# Altium PCB lab2_lyahovskij_buck.PcbDoc
Units mm, origin at the board's own origin, x right, y up, seen from the top; angles counter-clockwise.
Board outline 65 x 24 mm, 2 copper layers (Top Layer, Bottom Layer), stack 1.536 mm thick; 39 components, 24 nets, 118 pads, 157 vias.
Unrouted connection lines stored in the file: 1.
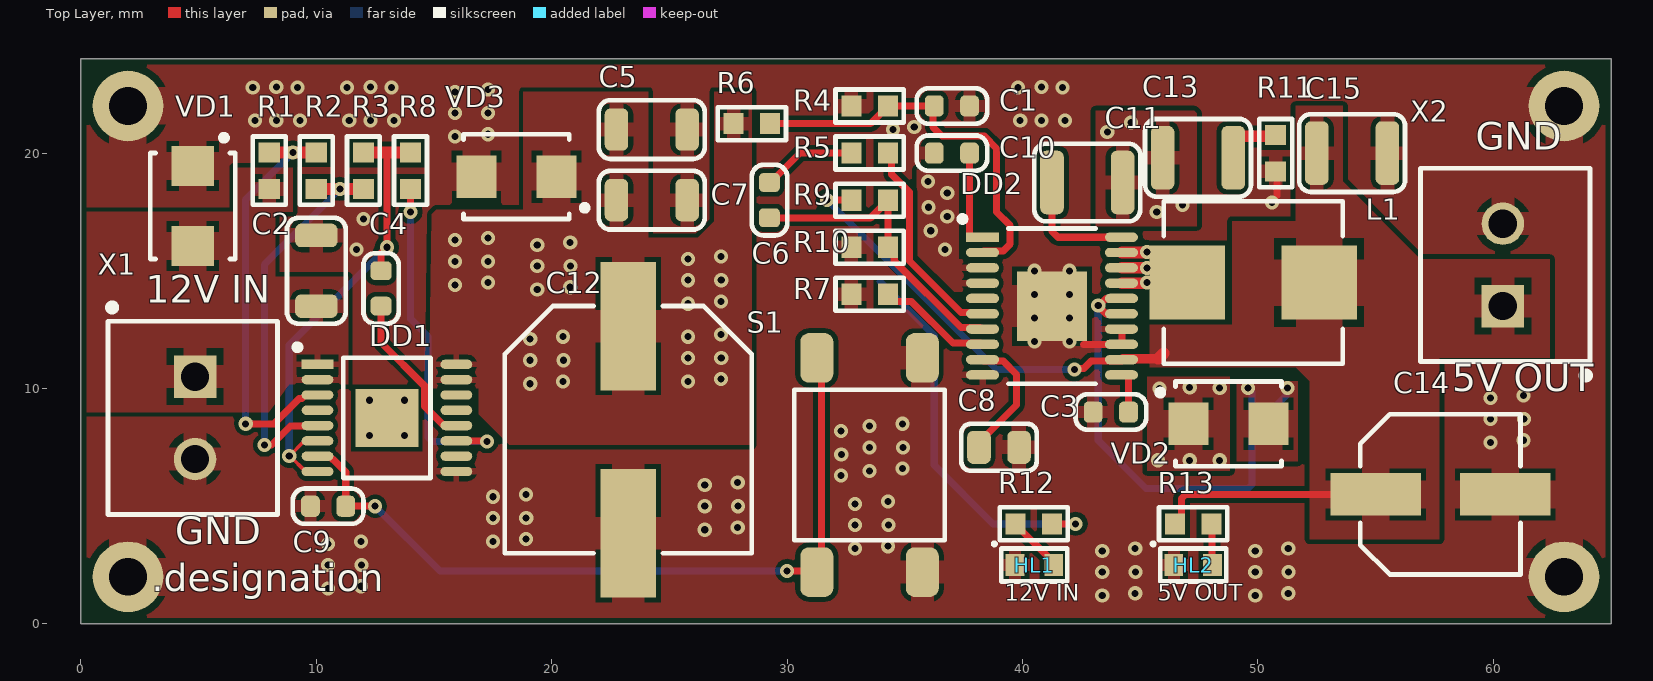
[diagram p0: Top Layer view]
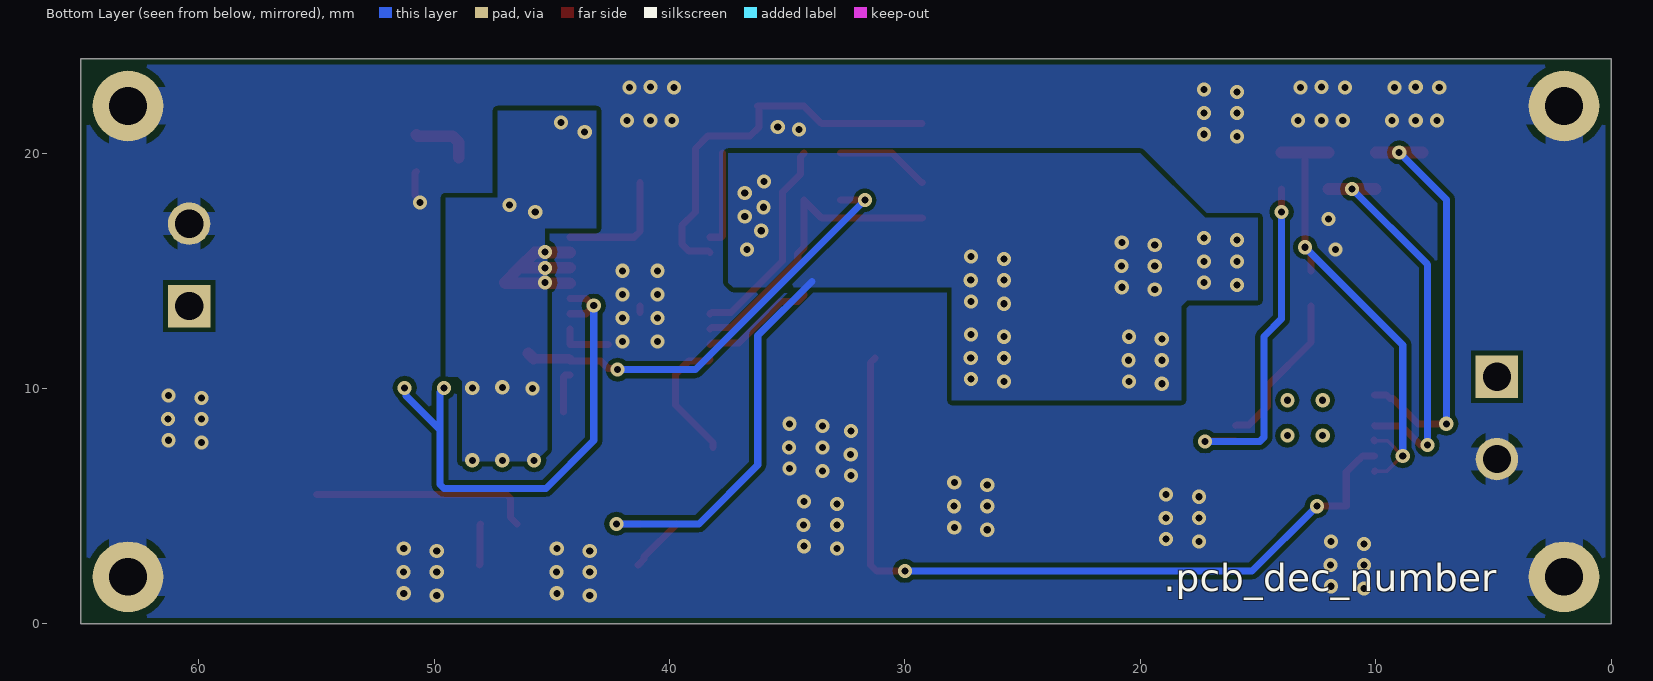
[diagram p1: Bottom Layer view, seen from below]

## Layer stack, top to bottom
Top Solder: solder mask 0.0102, Solder Resist, Dk 3.5
Top Layer: signal copper 0.018
Core 1: core 1.5, FR4, Dk 4.6
Bottom Layer: signal copper 0.018
Bottom Solder: solder mask 0.0102, Solder Resist, Dk 3.5

## Board outline
0,0 65,0 65,24 0,24

## Design rules (kind name [scope] priority, off if disabled: settings)
AcuteAngle min_acute_angle [OnCopper] p1: minimum=3.50000000000000E+0001 checktracksonly=FALSE // Минимальный угол между примитивами топологии
BoardOutlineClearance board_outline_clearance_std [NOT (OnLayer('Bottom Overlay') OR OnLayer('Top Overlay'))] p1: gap=0.25 ignorepadtopadclearanceinfootprint=FALSE except(0: Arc-SplitContinuation Track-SplitContinuation SMDPad-SplitContinuation THPad-SplitContinuation Via-SplitContinuation Fill-SplitContinuation Poly-SplitContinuation Region-SplitContinuation Text-SplitContinuation) // Отступ элементов топологии от края фрезеруемой печатной платы
Clearance clearance_outer_18um_std [OnTopLayer OR OnBottomLayer] p1: gap=0.125 ignorepadtopadclearanceinfootprint=TRUE except(0.2: Arc-Fill Arc-Poly Track-Fill Track-Poly SMDPad-SMDPad SMDPad-Fill SMDPad-Poly THPad-Fill THPad-Poly Via-Fill Via-Poly Fill-Fill Fill-Poly Poly-Poly Poly-Region Poly-Text; 0.25: Arc-Hole Track-Hole SMDPad-Hole THPad-Hole Via-Hole Fill-Hole Poly-Hole Region-Hole Text-Hole) // Зазоры на внешних слоях
Clearance clearance_inner_18um_std [NOT (OnTopLayer Or OnBottomLayer)] p2: gap=0.125 ignorepadtopadclearanceinfootprint=FALSE except(0.2: Arc-Fill Arc-Poly Track-Fill Track-Poly SMDPad-SMDPad SMDPad-Fill SMDPad-Poly THPad-Fill THPad-Poly Via-Fill Via-Poly Fill-Fill Fill-Poly Poly-Poly Poly-Region Poly-Text; 0.25: Arc-Hole Track-Hole SMDPad-Hole THPad-Hole Via-Hole Fill-Hole Poly-Hole Region-Hole Text-Hole) // Зазоры на внутренних слоях
ComponentClearance [All] p1: gap=0 collisioncheckmode=3 verticalgap=0 showdistances=FALSE
DiffPairsRouting diff_pairs_routing [All] p1: maxlimit=0.127 minlimit=0.127 mostfreqgap=0.127 toplayer_minwidth=0.143 toplayer_maxwidth=0.143 toplayer_prefwidth=0.143 bottomlayer_minwidth=0.143 bottomlayer_maxwidth=0.143 bottomlayer_prefwidth=0.143 impedanceprofiledriven=TRUE impedanceprofileid={FD46899E-B5A2-4EF5-A302-5D2DB6A51F35} maxuncoupledlength=12.7 // Правила трассировки дифференциальных пар
HoleSize min_hole_size_std [IsPad] p1: absolutevalues=TRUE maxlimit=5.9 minlimit=0.6 maxpercent=80.000 minpercent=20.000 // Диаметр межслойного переходного отверстия
HoleSize min_hole_size_via_std [IsVia] p2: absolutevalues=TRUE maxlimit=5.9 minlimit=0.3 maxpercent=80.000 minpercent=20.000 // Минимальный диаметр монтажного отверстия
HoleToHoleClearance hole_to_hole_clearance_std [All] p1: gap=0.2 allowstackedmicrovias=FALSE // Минимальное расстояние между краями двух отверстий
MinimumAnnularRing min_via_ar_std [All] p1: minimumring=0.15 // Поясок площадки переходного отверстия (Annular ring VIA)
MinimumAnnularRing min_pad_ar_std [All] p2: minimumring=0.2 // Поясок монтажной контактной площадки (Annular ring PAD)
MinimumSolderMaskSliver min_solder_mask_bridge_std [All] p1: minsoldermaskwidth=0.15 // Мнимальная ширина масочного мостика
PlaneClearance plane_clearance_18um_std [All] p1: clearance=0.2 // Отступ полигона (для слоя plane) от элементов топологии
PlaneConnect [All] p1: planeconnectstyle=Relief reliefexpansion=0.5 reliefentries=4 reliefconductorwidth=0.2 reliefairgap=0.2
PolygonConnect poly_connect_to_pad<=0.3 [(AsMM(PadXSize_AllLayers)<=0.301) or (AsMM(PadYSize_AllLayers)<=0.301)] p1: thpad.connectstyle=Relief thpad.reliefconductorwidth=0.2 thpad.reliefentries=4 thpad.polygonreliefangle="90 Angle" thpad.airgapwidth=0.2 smdpad.connectstyle=Relief smdpad.reliefconductorwidth=0.2 smdpad.reliefentries=4 smdpad.polygonreliefangle="90 Angle" smdpad.airgapwidth=0.2 via.connectstyle=Direct via.reliefconductorwidth=0.254 via.reliefentries=4 via.polygonreliefangle="90 Angle" via.airgapwidth=0.254 // Правила подключения полигонов для падов от 0,3мм и меньше
PolygonConnect poly_connect_to_pad<=0.4 [(AsMM(PadXSize_AllLayers)<=0.401) or (AsMM(PadYSize_AllLayers)<=0.401)] p2: thpad.connectstyle=Relief thpad.reliefconductorwidth=0.26 thpad.reliefentries=4 thpad.polygonreliefangle="90 Angle" thpad.airgapwidth=0.2 smdpad.connectstyle=Relief smdpad.reliefconductorwidth=0.26 smdpad.reliefentries=4 smdpad.polygonreliefangle="90 Angle" smdpad.airgapwidth=0.2 via.connectstyle=Direct via.reliefconductorwidth=0.254 via.reliefentries=4 via.polygonreliefangle="90 Angle" via.airgapwidth=0.254 // Правила подключения полигонов для падов от 0,4 и меньше
PolygonConnect poly_connect_to_pad<=0.6 [(AsMM(PadXSize_AllLayers)<=0.601) or (AsMM(PadYSize_AllLayers)<=0.601)] p3: thpad.connectstyle=Relief thpad.reliefconductorwidth=0.33 thpad.reliefentries=4 thpad.polygonreliefangle="90 Angle" thpad.airgapwidth=0.2 smdpad.connectstyle=Relief smdpad.reliefconductorwidth=0.33 smdpad.reliefentries=4 smdpad.polygonreliefangle="90 Angle" smdpad.airgapwidth=0.2 via.connectstyle=Direct via.reliefconductorwidth=0.254 via.reliefentries=4 via.polygonreliefangle="90 Angle" via.airgapwidth=0.254 // Правила подключения полигонов для падов от 0,6мм и меньше
PolygonConnect poly_connect_to_pad<=0.7 [(AsMM(PadXSize_AllLayers)<=0.701) or (AsMM(PadYSize_AllLayers)<=0.701)] p4: thpad.connectstyle=Relief thpad.reliefconductorwidth=0.46 thpad.reliefentries=4 thpad.polygonreliefangle="90 Angle" thpad.airgapwidth=0.2 smdpad.connectstyle=Relief smdpad.reliefconductorwidth=0.46 smdpad.reliefentries=4 smdpad.polygonreliefangle="90 Angle" smdpad.airgapwidth=0.2 via.connectstyle=Direct via.reliefconductorwidth=0.254 via.reliefentries=4 via.polygonreliefangle="90 Angle" via.airgapwidth=0.254 // Правила подключения полигонов для падов от 0,7мм и меньше
PolygonConnect poly_connect_to_pad<=0.8 [(AsMM(PadXSize_AllLayers)<=0.8)or(AsMM(PadYSize_AllLayers)<=0.8)] p5: thpad.connectstyle=Relief thpad.reliefconductorwidth=0.53 thpad.reliefentries=4 thpad.polygonreliefangle="90 Angle" thpad.airgapwidth=0.3 smdpad.connectstyle=Relief smdpad.reliefconductorwidth=0.53 smdpad.reliefentries=4 smdpad.polygonreliefangle="90 Angle" smdpad.airgapwidth=0.2 via.connectstyle=Direct via.reliefconductorwidth=0.254 via.reliefentries=4 via.polygonreliefangle="90 Angle" via.airgapwidth=0.254 // Правила подключения полигонов для падов от 0,8мм и меньше
PolygonConnect poly_connect_to_pad<=1 [(AsMM(PadXSize_AllLayers)<=1.01)or(AsMM(PadYSize_AllLayers)<=1.01)] p6: thpad.connectstyle=Relief thpad.reliefconductorwidth=0.6 thpad.reliefentries=4 thpad.polygonreliefangle="90 Angle" thpad.airgapwidth=0.3 smdpad.connectstyle=Relief smdpad.reliefconductorwidth=0.6 smdpad.reliefentries=4 smdpad.polygonreliefangle="90 Angle" smdpad.airgapwidth=0.2 via.connectstyle=Direct via.reliefconductorwidth=0.254 via.reliefentries=4 via.polygonreliefangle="90 Angle" via.airgapwidth=0.254 // Правила подключения полигонов для падов от 1мм и меньше
PolygonConnect poly_connect_to_pad<=1.3 [(AsMM(PadXSize_AllLayers)<=1.31)or(AsMM(PadYSize_AllLayers)<=1.31)] p7: thpad.connectstyle=Relief thpad.reliefconductorwidth=0.66 thpad.reliefentries=4 thpad.polygonreliefangle="90 Angle" thpad.airgapwidth=0.3 smdpad.connectstyle=Relief smdpad.reliefconductorwidth=0.86 smdpad.reliefentries=4 smdpad.polygonreliefangle="90 Angle" smdpad.airgapwidth=0.2 via.connectstyle=Direct via.reliefconductorwidth=0.254 via.reliefentries=4 via.polygonreliefangle="90 Angle" via.airgapwidth=0.254 // Правила подключения полигонов для падов от 1,3мм и меньше
PolygonConnect poly_connect_to_pad<=1.6 [(AsMM(PadXSize_AllLayers)<=1.61)or(AsMM(PadYSize_AllLayers)<=1.61)] p8: thpad.connectstyle=Relief thpad.reliefconductorwidth=0.8 thpad.reliefentries=4 thpad.polygonreliefangle="90 Angle" thpad.airgapwidth=0.3 smdpad.connectstyle=Relief smdpad.reliefconductorwidth=1 smdpad.reliefentries=4 smdpad.polygonreliefangle="90 Angle" smdpad.airgapwidth=0.2 via.connectstyle=Direct via.reliefconductorwidth=0.254 via.reliefentries=4 via.polygonreliefangle="90 Angle" via.airgapwidth=0.254 // Правила подключения полигонов для падов от 1,6мм и меньше
PolygonConnect poly_connect_to_pad<=1.8 [(AsMM(PadXSize_AllLayers)<=1.8)or(AsMM(PadYSize_AllLayers)<=1.8)] p9: thpad.connectstyle=Relief thpad.reliefconductorwidth=1 thpad.reliefentries=4 thpad.polygonreliefangle="90 Angle" thpad.airgapwidth=0.3 smdpad.connectstyle=Relief smdpad.reliefconductorwidth=1.2 smdpad.reliefentries=4 smdpad.polygonreliefangle="90 Angle" smdpad.airgapwidth=0.2 via.connectstyle=Direct via.reliefconductorwidth=0.254 via.reliefentries=4 via.polygonreliefangle="90 Angle" via.airgapwidth=0.254 // Правила подключения полигонов для падов от 1,8мм и меньше
PolygonConnect poly_connect_to_pad<=2 [(AsMM(PadXSize_AllLayers)<=2.01)or(AsMM(PadYSize_AllLayers)<=2.01)] p10: thpad.connectstyle=Relief thpad.reliefconductorwidth=1.1 thpad.reliefentries=4 thpad.polygonreliefangle="90 Angle" thpad.airgapwidth=0.3 smdpad.connectstyle=Relief smdpad.reliefconductorwidth=1.4 smdpad.reliefentries=4 smdpad.polygonreliefangle="90 Angle" smdpad.airgapwidth=0.2 via.connectstyle=Direct via.reliefconductorwidth=0.254 via.reliefentries=4 via.polygonreliefangle="90 Angle" via.airgapwidth=0.254 // Правила подключения полигонов для падов от 2мм и меньше
PolygonConnect poly_connect_to_pad<=2.3 [(AsMM(PadXSize_AllLayers)<=2.31)or(AsMM(PadYSize_AllLayers)<=2.31)] p11: thpad.connectstyle=Relief thpad.reliefconductorwidth=1.2 thpad.reliefentries=4 thpad.polygonreliefangle="90 Angle" thpad.airgapwidth=0.3 smdpad.connectstyle=Relief smdpad.reliefconductorwidth=1.4 smdpad.reliefentries=4 smdpad.polygonreliefangle="90 Angle" smdpad.airgapwidth=0.2 via.connectstyle=Direct via.reliefconductorwidth=0.254 via.reliefentries=4 via.polygonreliefangle="90 Angle" via.airgapwidth=0.254 // Правила подключения полигонов для падов от 2,3мм и меньше
PolygonConnect poly_connect_to_pad<=2.5 [(AsMM(PadXSize_AllLayers)<=2.51)or(AsMM(PadYSize_AllLayers)<=2.51)] p12: thpad.connectstyle=Relief thpad.reliefconductorwidth=1.2 thpad.reliefentries=4 thpad.polygonreliefangle="90 Angle" thpad.airgapwidth=0.3 smdpad.connectstyle=Relief smdpad.reliefconductorwidth=1.4 smdpad.reliefentries=4 smdpad.polygonreliefangle="90 Angle" smdpad.airgapwidth=0.2 via.connectstyle=Direct via.reliefconductorwidth=0.254 via.reliefentries=4 via.polygonreliefangle="90 Angle" via.airgapwidth=0.254 // Правила подключения полигонов для падов от 2,5мм и меньше
PolygonConnect poly_connect_to_pad<=2.7 [(AsMM(PadXSize_AllLayers)<=2.71)or(AsMM(PadYSize_AllLayers)<=2.71)] p13: thpad.connectstyle=Relief thpad.reliefconductorwidth=1.4 thpad.reliefentries=4 thpad.polygonreliefangle="90 Angle" thpad.airgapwidth=0.3 smdpad.connectstyle=Relief smdpad.reliefconductorwidth=1.6 smdpad.reliefentries=4 smdpad.polygonreliefangle="90 Angle" smdpad.airgapwidth=0.2 via.connectstyle=Direct via.reliefconductorwidth=0.254 via.reliefentries=4 via.polygonreliefangle="90 Angle" via.airgapwidth=0.254 // Правила подключения полигонов для падов от 2,7мм и меньше
PolygonConnect poly_connect_to_pad<=3 [(AsMM(PadXSize_AllLayers)<=3.01)or(AsMM(PadYSize_AllLayers)<=3.01)] p14: thpad.connectstyle=Relief thpad.reliefconductorwidth=1.6 thpad.reliefentries=4 thpad.polygonreliefangle="90 Angle" thpad.airgapwidth=0.3 smdpad.connectstyle=Relief smdpad.reliefconductorwidth=1.8 smdpad.reliefentries=4 smdpad.polygonreliefangle="90 Angle" smdpad.airgapwidth=0.2 via.connectstyle=Direct via.reliefconductorwidth=0.254 via.reliefentries=4 via.polygonreliefangle="90 Angle" via.airgapwidth=0.254 // Правила подключения полигонов для падов от 3мм и меньше
PolygonConnect poly_connect_to_pad<=7 [(AsMM(PadXSize_AllLayers)<7.01)or(AsMM(PadYSize_AllLayers)<=7.01)] p15: thpad.connectstyle=Relief thpad.reliefconductorwidth=2 thpad.reliefentries=4 thpad.polygonreliefangle="90 Angle" thpad.airgapwidth=0.4 smdpad.connectstyle=Relief smdpad.reliefconductorwidth=2 smdpad.reliefentries=4 smdpad.polygonreliefangle="90 Angle" smdpad.airgapwidth=0.3 via.connectstyle=Direct via.reliefconductorwidth=0.254 via.reliefentries=4 via.polygonreliefangle="90 Angle" via.airgapwidth=0.254 // Правила подключения полигонов для падов от 7мм и меньше
PolygonConnect poly_connect_to_pad [All] p16: thpad.connectstyle=Relief thpad.reliefconductorwidth=0.25 thpad.reliefentries=4 thpad.polygonreliefangle="90 Angle" thpad.airgapwidth=0.2 smdpad.connectstyle=Relief smdpad.reliefconductorwidth=0.25 smdpad.reliefentries=4 smdpad.polygonreliefangle="90 Angle" smdpad.airgapwidth=0.2 via.connectstyle=Direct via.reliefconductorwidth=0.25 via.reliefentries=4 via.polygonreliefangle="90 Angle" via.airgapwidth=0.2 // Правила подключения полигонов общие
RoutingCorners [All] p1 off: cornerstyle=45-Degree minsetback=2.5 maxsetback=2.5
RoutingVias [All] p1: holewidth=0.3 width=0.6 viastyle="Through Hole" minholewidth=0.3 minwidth=0.6 maxholewidth=5.9 maxwidth=6.4
SilkToSilkClearance silk_to_silk_clearance_std [All] p1 off: silktosilkclearance=0.15 // Отступ текста шелкографии от других примитивов шелкографии
SilkToSolderMaskClearance silk_to_solder_mask_clearance_std [IsPad] p1 off: minsilkscreentomaskgap=0.15 clearancetoexposedcopper=FALSE // Минимальное расстояние между элементами шелкографии и вскрытой медью
SolderMaskExpansion solder_mask_expansion_std [All] p1: expansion=0.05 // Припуск паяльной масски
UnRoutedNet [All] p1: checkbadconnections=TRUE
Width width_18um_std [All] p1: maxlimit=10 minlimit=0.125 preferedwidth=0.15 checkconnectedcopper=TRUE // Ширина проводников (общая)
19 further rules are at their usual default settings.

## Components (designator, comment, footprint, x,y, rotation, side; value= is the part's Value field where it differs from the comment)
C1 "4,7 мк" C0603 37,22 r0 top
C2 "1 мк" C1206 10,15 r90 top
C3 "0,01 мк" C0603 43.75,9 r180 top
C4 "82" C0603 12.75,14.25 r90 top
C5 "2,2 мк" C1206 24.25,21 r0 top
C6 "0,01 мк" C0603 29.25,18 r90 top
C7 "2,2 мк" C1206 24.25,18 r0 top
C8 "150" C0805 39,7.5 r0 top
C9 "0,1 мк" C0603 10.5,5 r180 top
C10 "0,47 мк" C0603 37,20 r180 top
C11 "0,022 мк" C1210 42.75,18.75 r0 top
C12 "47 мк" CAPAE-1000X1000X1200 23.25,8.25 r270 top
C13 "330" C1210 47.45,19.8 r0 top
C14 "150 мк" CAPAE-660X660X580 57.75,5.5 r0 top
C15 "22 мк" C1210 54,20 r0 top
DD1 "TPS26600PWPR" HTSSOP-16 13,8.75 r0 top
DD2 "LM5576MH/NOPB" HTSSOP-20 41.25,13.5 r0 top
HL1 "TLMG1100-GS08" HL0603 40.5,2.5 r0 top
HL2 "TLMB1100-GS08" HL0603 47.25,2.5 r0 top
L1 "SRP7028A-150M" SRP-2-730X660X280 49.8,14.5 r0 top
R1 "523 к" R0603 8,19.25 r270 top
R2 "26,7 к" R0603 10,19.25 r90 top
R3 "44,2 к" R0603 12,19.25 r270 top
R4 "2,2 к" R0603 33.5,22 r0 top
R5 "49,9 к" R0603 33.5,20 r180 top
R6 "15 к" R0603 28.5,21.25 r180 top
R7 "21 к" R0603 33.5,14 r0 top
R8 "6,04 к" R0603 14,19.25 r270 top
R9 "5,1 к" R0603 33.5,18 r180 top
R10 "1,6 к" R0603 33.5,16 r0 top
R11 "22" R0603 50.75,20 r90 top
R12 "22 к" R0603 40.475,4.25 r0 top
R13 "10 к" R0603 47.25,4.25 r0 top
S1 "FSM4JSMA" FSM4JSMA 33.5,6.75 r90 top
VD1 "1.5SMC62CA" DO-214AB 4.75,17.75 r270 top
VD2 "SS36-E3/57T" DO-214AB 48.75,8.5 r0 top
VD3 "SL13-E3/5AT" DO-214AC 18.5,19 r180 top
X1 "1776275-2" 1776275-2 4.75,8.75 r270 top
X2 "1776275-2" 1776275-2 60.5,15.25 r90 top

## Footprints (in the part's own frame and the unit in brackets; to place one, negate y for a bottom-side part, rotate by r counter-clockwise, add the part's x,y. Pads: shape width x height; smd on the part's side, far side on the other; paste and mask are expansions set on the pad)
1776275-2 [mm] "PCB Terminal Blocks, Header, Wire-to-Board, 2 Position, 3.5mm [.138in] Centerline, 1 Row, Side Wire Entry Angle, 26 – 18AWG Wire Size"
  rect 1.8x1.8 hole 1.2: 1(-1.75,0.1)
  round 1.8 hole 1.2: 2(1.75,0.1)
  silkscreen extent -4.7,-3.6 4.1,3.6, body extent -4,-3.5 4,3.5, height 8.3
C0603 [mm] "Chip Capacitor, 2-Leads, Body 1,60x0,80mm, IPC Medium Density"
  rrect50% 0.8x0.9 smd: 1(-0.75,0) 2(0.75,0)
  silkscreen extent -1.5,-0.75 1.5,0.75, body extent -0.8,-0.4 0.8,0.4, height 0.8
C0805 [mm] "Chip Capasitor, 2-Leads, Body 2,00x1,25mm, IPC Medium Density"
  rrect50% 1x1.4 smd: 1(-0.85,0) 2(0.85,0)
  silkscreen extent -1.6,-1 1.6,1, body extent -1,-0.62 1,0.63, height 0.6
C1206 [mm] "Chip Capacitor, 2-Leads, Body 3,20x1,60mm, IPC Medium Density"
  rrect50% 1x1.8 smd: 1(-1.5,0) 2(1.5,0)
  silkscreen extent -2.25,-1.25 2.25,1.25, body extent -1.6,-0.8 1.6,0.8, height 0.78
C1210 [mm] "Chip Capacitor, 2-Leads, Body 3,20x2,50mm, IPC Medium Density"
  rrect50% 1x2.7 smd: 1(-1.5,0) 2(1.5,0)
  silkscreen extent -2.25,-1.65 2.25,1.65, body extent -1.6,-1.25 1.6,1.25, height 0.78
CAPAE-660X660X580 [mm] "Aluminum Electrolytic Capacitor, Body 6,60x6,60x6,10mm, IPC Low Density"
  rect 3.85x1.8 smd: 1(-2.75,0) 2(2.75,0)
  silkscreen extent -3.4,-3.4 3.4,3.4, body extent -3.65,-3.3 3.65,3.3, height 5.8
CAPAE-1000X1000X1200 [mm] "Aluminum Electrolytic Capacitor, Body 10,50x10,50x12,50mm, IPC Low Density"
  rect 5.45x2.35 smd: 1(-4.4,0) 2(4.4,0)
  silkscreen extent -5.25,-5.25 5.25,5.25, body extent -6.05,-5.25 6.05,5.25, height 12.5
DO-214AB [mm] "Molded Diode, 2-Leads, Body 6,86x5,91mm, IPC Medium Density"
  rect 1.7x1.8 smd: 1(-1.7,0) 2(1.7,0)
  silkscreen extent -3.02,-1.8 2.25,1.8, body extent -2.7,-1.81 2.7,1.81, height 2.43
DO-214AC [mm] "Molded Diode, 2-Leads, Body 4,25x2,67mm, IPC Medium Density"
  rect 1.7x1.8 smd: 1(-1.7,0) 2(1.7,0)
  silkscreen extent -3.03,-1.8 2.25,1.8, body extent -2.7,-1.81 2.7,1.81, height 2.43
FSM4JSMA [mm]
  rrect50% 2.1x1.4 smd: 1(-4.55,2.24) 1(4.55,2.24) 2(-4.55,-2.24) 2(4.55,-2.24)
  silkscreen extent -3.2,-3.2 3.2,3.2, body extent -5,-3 5,3, height 5.13
HL0603 [mm] "Chip Diode, 2-Leads, Body 1,60x0,80mm, IPC Medium Density"
  rect 0.8x0.95 smd: 1(-0.825,0) 2(0.825,0)
  silkscreen extent -1.75,-0.7 1.4,0.95, body extent -0.81,-0.4 0.81,0.4, height 0.6
HTSSOP-16 [mm] "TSOP, 16-Leads, Body 5,00x4,40mm, Pitch 0,65mm, Thermal Pad 2,46x2,66mm, IPC Medium Density"
  rect 2.66x2.46 smd: 0(0,0)
  rect 1.35x0.4 smd: 1(-2.95,2.275)
  oval 1.35x0.4 smd: 2(-2.95,1.625) 3(-2.95,0.975) 4(-2.95,0.325) 5(-2.95,-0.325) 6(-2.95,-0.975) 7(-2.95,-1.625) 8(-2.95,-2.275) 9(2.95,-2.275) 10(2.95,-1.625) 11(2.95,-0.975) 12(2.95,-0.325) 13(2.95,0.325) 14(2.95,0.975) 15(2.95,1.625) 16(2.95,2.275)
  silkscreen extent -3.92,-2.55 1.85,3.12, body extent -3.2,-2.5 3.2,2.5, height 1.2
HTSSOP-20 [mm] "TSOP, 20-Leads, Body 6,50x4,40mm, Pitch 0,65mm, Thermal Pad 2,96x2,96mm, IPC Medium Density"
  rect 2.96x2.96 smd: 0(0,0)
  rect 1.4x0.4 smd: 1(-2.95,2.925)
  oval 1.4x0.4 smd: 2(-2.95,2.275) 3(-2.95,1.625) 4(-2.95,0.975) 5(-2.95,0.325) 6(-2.95,-0.325) 7(-2.95,-0.975) 8(-2.95,-1.625) 9(-2.95,-2.275) 10(-2.95,-2.925) 11(2.95,-2.925) 12(2.95,-2.275) 13(2.95,-1.625) 14(2.95,-0.975) 15(2.95,-0.325) 16(2.95,0.325) 17(2.95,0.975) 18(2.95,1.625) 19(2.95,2.275) 20(2.95,2.925)
  silkscreen extent -3.92,-3.3 1.85,3.82, body extent -3.2,-3.25 3.2,3.25, height 1.1
R0603 [mm] "Chip Resistor, 2-Leads, Body 1,60x0,80mm, IPC Medium Density"
  rect 0.85x0.9 smd: 1(-0.775,0) 2(0.775,0)
  silkscreen extent -1.45,-0.7 1.45,0.7, body extent -0.8,-0.4 0.8,0.4, height 0.45
SRP-2-730X660X280 [mm] "Precision Wire Wound Inductor, 2-Leads, Body 7,30x6,60mm, IPC Medium Density"
  rect 3.2x3.15 smd: 1(-2.8,0) 2(2.8,0)
  silkscreen extent -3.8,-3.45 3.8,3.45, body extent -3.7,-3.3 3.7,3.3, height 3

## Part data
C1: library part c0082, "=Описание", HelpURL=https://www.yageo.com/upload/media/product/productsearch/datasheet/mlcc/UPY-GPHC_X7R_6.3V-to-50V_20.pdf, ID=c0082, Корпус=0603, Наименование=CC0603KRX7R6BB475, Напряжение="10 В", Номинал="4,7 мк", Номинальное напряжение="10 В", Описание="Конденсатор чип 0603 4,7 мкФ 10 В ±10 %", Отклонение="±10 %", Производитель="YAGEO Corp.", Рабочие температуры="от –55 °С до +125 °С", Температурный коэффициент емкости=X7R, Фамилия=Паньков
C2: library part c0066, "=Описание", HelpURL=https://www.yageo.com/upload/media/product/productsearch/datasheet/mlcc/UPY-NP0X7R_MV_100-to-630V_22.pdf, ID=c0066, Корпус=1206, Наименование=CC1206KKX7R0BB105, Напряжение="100 В", Номинал="1 мк", Номинальное напряжение="100 В", Описание="Конденсатор чип 1206 1 мкФ 100 В ±10 %", Отклонение="±10 %", Производитель="YAGEO Corp.", Рабочие температуры="от –55 °С до +125 °С", Температурный коэффициент емкости=X7R, Фамилия=Ларионов
C3 C6: library part c0021, "=Описание", HelpURL=https://www.yageo.com/upload/media/product/productsearch/datasheet/mlcc/UPY-NP0X7R_MV_100-to-630V_22.pdf, ID=c0021, Корпус=0603, Наименование=CC0603JRX7R0BB103, Напряжение="100 В", Номинал="0,01 мк", Номинальное напряжение="100 В", Описание="Конденсатор чип 0603 10 нФ 100 В ±5 %", Отклонение="±5 %", Производитель="YAGEO Corp.", Рабочие температуры="от –55 °С до +125 °С", Температурный коэффициент емкости=X7R, Фамилия=Ларионов
C4: library part c0011, "=Описание", HelpURL=https://www.yageo.com/upload/media/product/productsearch/datasheet/mlcc/UPY-GP_NP0_16V-to-50V_18.pdf, ID=c0011, Корпус=0603, Наименование=CC0603JRNPO7BN820, Напряжение="16 В", Номинал=82, Номинальное напряжение="16 В", Описание="Конденсатор чип 0603 82 пФ 16 В ±5 %", Отклонение="±5 %", Производитель="YAGEO Corp.", Рабочие температуры="от –55 °С до +125 °С", Температурный коэффициент емкости=C0G, Фамилия=Ларионов
C5 C7: library part c0076, "=Описание", HelpURL=https://www.yageo.com/upload/media/product/productsearch/datasheet/mlcc/UPY-NP0X7R_MV_100-to-630V_22.pdf, ID=c0076, Корпус=1206, Наименование=CC1206KKX7R0BB225, Напряжение="100 В", Номинал="2,2 мк", Номинальное напряжение="100 В", Описание="Конденсатор чип 1206 2,2 мкФ 100 В ±10 %", Отклонение="±10 %", Производитель="YAGEO Corp.", Рабочие температуры="от –55 °С до +125 °С", Температурный коэффициент емкости=X7R, Фамилия=Ларионов
C8: library part c0121, "=Описание", HelpURL=https://www.kemet.com/en/us/capacitors/ceramic/product/C0805C151G1GACTU.html, ID=c0121, Корпус=0805, Наименование=C0805C151G1GACTU, Напряжение="100 В", Номинал=150, Номинальное напряжение="100 В", Описание="Конденсатор чип 0805 150 пФ 100 В ±2 %", Отклонение="±2 %", Производитель="KEMET Corporation", Рабочие температуры="от –55 °С до +125 °С", Температурный коэффициент емкости=C0G, Фамилия=Ляховский
C9: library part c0036, "=Описание", HelpURL=https://www.yageo.com/upload/media/product/productsearch/datasheet/mlcc/UPY-NP0X7R_MV_100-to-630V_22.pdf, ID=c0036, Корпус=0603, Наименование=CC0603KRX7R0BB104, Напряжение="100 В", Номинал="0,1 мк", Номинальное напряжение="100 В", Описание="Конденсатор чип 0603 100 нФ 100 В ±10 %", Отклонение="±10 %", Производитель="YAGEO Corp.", Рабочие температуры="от –55 °С до +125 °С", Температурный коэффициент емкости=X7R, Фамилия=Ларионов
C10: library part c0054, "=Описание", HelpURL=https://www.yageo.com/upload/media/product/products/datasheet/mlcc/UPY-GPHC_X7R_6.3V-to-50V_20.pdf, ID=c0054, Корпус=0603, Наименование=CC0603KRX7R7BB474, Напряжение="16 В", Номинал="0,47 мк", Номинальное напряжение="16 В", Описание="Конденсатор чип 0603 470 нФ 16 В ±10 %", Отклонение="±10 %", Производитель="YAGEO Corp.", Рабочие температуры="от –55 °С до +125 °С", Температурный коэффициент емкости=X7R, Фамилия=Паньков
C11: library part c0119, "=Описание", HelpURL=https://www.yageo.com/upload/media/product/productsearch/datasheet/mlcc/UPY-NP0X7R_MV_100-to-630V_22.pdf, ID=c0119, Корпус=1210, Наименование=CC1210KKX7R0BB223, Напряжение="100 В", Номинал="0,022 мк", Номинальное напряжение="100 В", Описание="Конденсатор чип 1210 0,022 мкФ 100 В ±10 %", Отклонение="±10 %", Производитель="YAGEO Corp.", Рабочие температуры="от –55 °С до +125 °С", Температурный коэффициент емкости=X7R, Фамилия=Ляховский
C12: library part c0118, "=Описание", HelpURL=https://www.vishay.com/capacitors/list/product-28403/, ID=c0118, Корпус="CAPAE (10 x 10 x 12)", Наименование=MAL214699904E3, Напряжение="100 В", Номинал="47 мк", Номинальное напряжение="100 В", Описание="Конденсатор электролитический 47 мкФ 100 В ±20 %", Отклонение="±20 %", Производитель="Vishay Intertechnology, Inc.", Рабочие температуры="от –55 °С до +125 °С", Температурный коэффициент емкости=-, Фамилия=Ларионов
C13: library part c0012, "=Описание", HelpURL=https://www.yageo.com/upload/media/product/productsearch/datasheet/mlcc/UPY-NP0X7R_MV_100-to-630V_22.pdf, ID=c0012, Корпус=1210, Наименование=CC1210JKNPOBBN331, Напряжение="500 В", Номинал=330, Номинальное напряжение="500 В", Описание="Конденсатор чип 1210 330 пФ 500 В ±10 %", Отклонение="±5 %", Производитель="YAGEO Corp.", Рабочие температуры="от –55 °С до +125 °С", Температурный коэффициент емкости=C0G, Фамилия=Ляховский
C14: library part c0120, "=Описание", HelpURL=https://industrial.panasonic.com/ww/products/capacitors/aluminum-capacitors/aluminum-cap-smd/models/EEEFK1A151AL, ID=c0120, Корпус="CAPAE (6,6 x 6,6 x 5,8)", Наименование=EEEFK1A151AL, Напряжение="10 В", Номинал="150 мк", Номинальное напряжение="10 В", Описание="Конденсатор электролитический 150 мкФ 10 В ±20 %", Отклонение="±20 %", Производитель="Panasonic Corporation", Рабочие температуры="от –55 °С до +105 °С", Температурный коэффициент емкости=-, Фамилия=Водорезов
C15: library part c0113, "=Описание", HelpURL=https://www.murata.com/en-us/products/productdetail?partno=GRM32ER61E226KE15%23, ID=c0113, Корпус=1210, Наименование=GRM32ER61E226KE15L, Напряжение="25 В", Номинал="22 мк", Номинальное напряжение="25 В", Описание="Конденсатор чип 1210 22 мкФ 25 В ±10 %", Отклонение="±10 %", Производитель="Murata Manufacturing Co., Ltd.", Рабочие температуры="от –55 °С до +85 °С", Температурный коэффициент емкости=X5R, Фамилия=Ляпцев
DD1: library part dd0001, "=Описание", HelpURL=https://www.ti.com/product/TPS2660, ID=dd0001, Корпус=HTSSOP-16, Максимальное напряжение="62 В", Наименование=TPS26600PWPR, Напряжение="от 4,2 В до 60 В", Описание="Защитная микросхема eFuse 60 В и 2 А", Производитель="Texas Instruments", Рабочие температуры="от -40 °С до +125 °С", Ток="от 0,1 А до 2,23 А", Фамилия=Ларионов
DD2: library part dd0016, "=Описание", HelpURL=https://www.ti.com/product/LM5576, ID=dd0016, Входное напряжение="от 6 В до 75 В", Выходное напряжение="от 1,23 В до 70 В", Коммутируемый ток="до 3 А", Корпус=HTSSOP-20, Наименование=LM5576MH/NOPB, Описание="Понижающий преобразователь напряжения 75 В и 3 А", Производитель="Texas Instruments", Рабочие температуры="от –40 °С до +125 °С", Фамилия=Ляховский, Частота переключения="от 50 кГц до 500 кГц"
HL1: library part hl0005, "=Описание", HelpURL=https://www.vishay.com/leds/list/product-83173/, ID=hl0005, Корпус=0603, Наименование=TLMG1100-GS08, Номинальная длина волны="570 нм", Номинальная сила света="35 мкд", Номинальное падение напряжения="2,1 В", Номинальный прямой ток="30 мА", Описание="Светодиод чип 0603 зеленый", Производитель="Vishay Intertechnology, Inc.", Рабочие температуры="от –40 °С до +100 °С", Рассеиваемая мощность="90 мВт", Фамилия=Ларионов, Цвет=Green
HL2: library part hl0006, "=Описание", HelpURL=https://www.vishay.com/leds/list/product-83173/, ID=hl0006, Корпус=0603, Наименование=TLMB1100-GS08, Номинальная длина волны="466 нм", Номинальная сила света="5 мкд", Номинальное падение напряжения="3,9 В", Номинальный прямой ток="30 мА", Описание="Светодиод чип 0603 синий", Примечание="Not for new design", Производитель="Vishay Intertechnology, Inc.", Рабочие температуры="от –40 °С до +100 °С", Рассеиваемая мощность="90 мВт", Фамилия=Ларионов, Цвет=Blue
L1: library part l0009, "=Описание", HelpURL=https://www.bourns.com/products/magnetic-products/power-inductors-aec-q200-compliant/product/SRP7028A, ID=l0009, Индуктивность="15 мкГн", Корпус="7,3 x 6,6 x 2,8", Максимальное активное сопротивление="123 мОм", Наименование=SRP7028A-150M, Номинал="15 мкГн", Номинальное активное сопротивление="107 мОм", Номинальный ток (при нагреве на 20 °С/40 °С)="3 А", Описание="Катушка индуктивности 15 мкГн ±20 %", Отклонение="±20 %", Производитель="Bourns, Inc.", Рабочее напряжение="не указано", Рабочие температуры="от –55 °С до +150 °С", Резонансная частота="12 МГц", Ток насыщения="4 А", Фамилия=Ляховский
R1: library part r0119, "=Описание", HelpURL=https://www.yageo.com/upload/media/product/productsearch/datasheet/rchip/PYu-RC_Group_51_RoHS_L_11.pdf, ID=r0119, Корпус=0603, Наименование=RC0603FR-07523KL, Номинал="523 к", Номинальное напряжение="75 В", Номинальный ток="1 А", Описание="Резистор чип 0603 523 кОм ±1 % 0,1 Вт", Отклонение="±1 %", Производитель="YAGEO Corp.", Рабочие температуры="от –55 °С до +155 °С", Фамилия=Жернаков
R2: library part r0073, "=Описание", HelpURL=https://www.yageo.com/upload/media/product/productsearch/datasheet/rchip/PYu-RC_Group_51_RoHS_L_11.pdf, ID=r0073, Корпус=0603, Наименование=RC0603FR-0726K7L, Номинал="26,7 к", Номинальное напряжение="75 В", Номинальный ток="1 А", Описание="Резистор чип 0603 26,7 кОм ±1 % 0,1 Вт", Отклонение="±1 %", Производитель="YAGEO Corp.", Рабочие температуры="от –55 °С до +155 °С", Фамилия=Ларионов
R3: library part r0082, "=Описание", HelpURL=https://www.yageo.com/upload/media/product/productsearch/datasheet/rchip/PYu-RC_Group_51_RoHS_L_11.pdf, ID=r0082, Корпус=0603, Наименование=RC0603FR-0744K2L, Номинал="44,2 к", Номинальное напряжение="75 В", Номинальный ток="1 А", Описание="Резистор чип 0603 44,2 кОм ±1 % 0,1 Вт", Отклонение="±1 %", Производитель="YAGEO Corp.", Рабочие температуры="от –55 °С до +155 °С", Фамилия=Ларионов
R4: library part r0040, "=Описание", HelpURL=https://www.yageo.com/upload/media/product/productsearch/datasheet/rchip/PYu-RC_Group_51_RoHS_L_11.pdf, ID=r0040, Корпус=0603, Наименование=RC0603FR-072K2L, Номинал="2,2 к", Номинальное напряжение="75 В", Номинальный ток="1 А", Описание="Резистор чип 0603 2,2 кОм ±1 % 0,1 Вт", Отклонение="±1 %", Примечание="Ряд E24", Производитель="YAGEO Corp.", Рабочие температуры="от –55 °С до +155 °С", Фамилия=Паньков
R5: library part r0129, "=Описание", HelpURL=https://www.yageo.com/upload/media/product/productsearch/datasheet/rchip/PYu-RC_Group_51_RoHS_L_11.pdf, ID=r0129, Корпус=0603, Наименование=RC0603FR-0749K9L, Номинал="49,9 к", Номинальное напряжение="75 В", Номинальный ток="1 А", Описание="Резистор чип 0603 49,9 кОм ±1 % 0,1 Вт", Отклонение="±1 %", Производитель="YAGEO Corp.", Рабочие температуры="от –55 °С до +155 °С", Фамилия=Ляховский
R6: library part r0066, "=Описание", HelpURL=https://www.yageo.com/upload/media/product/productsearch/datasheet/rchip/PYu-RC_Group_51_RoHS_L_11.pdf, ID=r0066, Корпус=0603, Наименование=RC0603FR-0715KL, Номинал="15 к", Номинальное напряжение="75 В", Номинальный ток="1 А", Описание="Резистор чип 0603 15 кОм ±1 % 0,1 Вт", Отклонение="±1 %", Примечание="Ряд E24", Производитель="YAGEO Corp.", Рабочие температуры="от –55 °С до +155 °С", Фамилия=Паньков
R7: library part r0130, "=Описание", HelpURL=https://www.yageo.com/upload/media/product/productsearch/datasheet/rchip/PYu-RC_Group_51_RoHS_L_11.pdf, ID=r0130, Корпус=0603, Наименование=RC0603FR-0721KL, Номинал="21 к", Номинальное напряжение="75 В", Номинальный ток="1 А", Описание="Резистор чип 0603 21 кОм ±1 % 0,1 Вт", Отклонение="±1 %", Примечание="Ряд E24", Производитель="YAGEO Corp.", Рабочие температуры="от –55 °С до +155 °С", Фамилия=Ляховский
R8: library part r0053, "=Описание", HelpURL=https://www.yageo.com/upload/media/product/productsearch/datasheet/rchip/PYu-RC_Group_51_RoHS_L_11.pdf, ID=r0053, Корпус=0603, Наименование=RC0603FR-076K04L, Номинал="6,04 к", Номинальное напряжение="75 В", Номинальный ток="1 А", Описание="Резистор чип 0603 6,04 кОм ±1 % 0,1 Вт", Отклонение="±1 %", Производитель="YAGEO Corp.", Рабочие температуры="от –55 °С до +155 °С", Фамилия=Ларионов
R9: library part r0051, "=Описание", HelpURL=https://www.yageo.com/upload/media/product/productsearch/datasheet/rchip/PYu-RC_Group_51_RoHS_L_11.pdf, ID=r0051, Корпус=0603, Наименование=RC0603FR-075K1L, Номинал="5,1 к", Номинальное напряжение="75 В", Номинальный ток="1 А", Описание="Резистор чип 0603 5,1 кОм ±1 % 0,1 Вт", Отклонение="±1 %", Примечание="Ряд E24", Производитель="YAGEO Corp.", Рабочие температуры="от –55 °С до +155 °С", Фамилия=Жернаков
R10: library part r0037, "=Описание", HelpURL=https://www.yageo.com/upload/media/product/productsearch/datasheet/rchip/PYu-RC_Group_51_RoHS_L_11.pdf, ID=r0037, Корпус=0603, Наименование=RC0603FR-071K6L, Номинал="1,6 к", Номинальное напряжение="75 В", Номинальный ток="1 А", Описание="Резистор чип 0603 1,6 кОм ±1 % 0,1 Вт", Отклонение="±1 %", Примечание="Ряд E24", Производитель="YAGEO Corp.", Рабочие температуры="от –55 °С до +155 °С", Фамилия=Паньков
R11: library part r0004, "=Описание", HelpURL=https://www.yageo.com/upload/media/product/productsearch/datasheet/rchip/PYu-RC_Group_51_RoHS_L_11.pdf, ID=r0004, Корпус=0603, Наименование=RC0603FR-0722RL, Номинал=22, Номинальное напряжение="75 В", Номинальный ток="1 А", Описание="Резистор чип 0603 22 Ом ±1 % 0,1 Вт", Отклонение="±1 %", Примечание="Ряд E24", Производитель="YAGEO Corp.", Рабочие температуры="от –55 °С до +155 °С", Фамилия=Ларионов
R12: library part r0071, "=Описание", HelpURL=https://www.yageo.com/upload/media/product/productsearch/datasheet/rchip/PYu-RC_Group_51_RoHS_L_11.pdf, ID=r0071, Корпус=0603, Наименование=RC0603FR-0722KL, Номинал="22 к", Номинальное напряжение="75 В", Номинальный ток="1 А", Описание="Резистор чип 0603 22 кОм ±1 % 0,1 Вт", Отклонение="±1 %", Примечание="Ряд E24", Производитель="YAGEO Corp.", Рабочие температуры="от –55 °С до +155 °С", Фамилия=Паньков
R13: library part r0060, "=Описание", HelpURL=https://www.yageo.com/upload/media/product/productsearch/datasheet/rchip/PYu-RC_Group_51_RoHS_L_11.pdf, ID=r0060, Корпус=0603, Наименование=RC0603FR-0710KL, Номинал="10 к", Номинальное напряжение="75 В", Номинальный ток="1 А", Описание="Резистор чип 0603 10 кОм ±1 % 0,1 Вт", Отклонение="±1 %", Примечание="Ряд E24", Производитель="YAGEO Corp.", Рабочие температуры="от –55 °С до +155 °С", Фамилия=Самарин
S1: library part s0001, "=Описание", HelpURL=https://www.te.com/usa-en/product-4-1437565-1.html, ID=s0001, Количество контактов=4, Корпус=6,00x6,00x4,98, Наименование=FSM4JSMA, Описание="Тактовая кнопка поверхностного монтажа", Производитель="TE Connectivity", Промывка=Разрешена, Рабочие температуры="от –35 °С до +85 °С", Сопротивление контакта="100 мОм", Ток нагрузки="50 мА @ 24 В", Фамилия=Паньков
VD1: library part vd0006, "=Описание", HelpURL=https://www.littelfuse.com/products/tvs-diodes/surface-mount/1_5smc.aspx, ID=vd0006, Корпус=DO-214AB, Наименование=1.5SMC62CA, Описание="Двунаправленная диодная сборка для подавления помех, 53 В", Производитель="Littelfuse, Inc.", Фамилия=Ларионов
VD2: library part vd0004, "=Описание", HelpURL=https://www.vishay.com/product?docid=88751, ID=vd0004, Импульсное обратное напряжение="60 В", Корпус=DO-214AB, Макс допустимый средний прямой ток="3 А", Наименование=SS36-E3/57T, Описание="Диод Шоттки 60 В 3 А", Пиковое прямое напряжение="0,75 В", Производитель="Vishay Intertechnology, Inc.", Рабочие температуры="от –55 °С до +150 °С", Фамилия=Жернаков
VD3: library part vd0002, "=Описание", HelpURL=https://www.vishay.com/product?docid=88740, ID=vd0002, Импульсное обратное напряжение="30 В", Корпус=DO-214AC, Макс допустимый средний прямой ток="1,5 А", Наименование=SL13-E3/5AT, Описание="Диод Шоттки 30 В 1,5 А", Пиковое прямое напряжение="0,445 В", Производитель="Vishay Intertechnology, Inc.", Рабочие температуры="от –55 °С до +125 °С", Фамилия=Ларионов
X1 X2: library part x0005, "=Описание", Contact_2=GND, HelpURL=https://www.te.com/usa-en/product-1776275-2.html, ID=x0005, Наименование=1776275-2, Описание="Клеммная колодка 2 pin 3,5 мм", Производитель="TE Connectivity", Фамилия=Паньков
  X1: Contact_1=12V_IN
  X2: Contact_1=5V_OUT

## Free pads (board coordinates)
  round 3 hole 1.6: 2(2,2) 2(2,22) 2(63,2) 2(63,22)

## Via types
v1: diameter 0.6, hole 0.3, Top Layer to Bottom Layer, tented top, 157 vias

## Nets (pads, with @x,y where several pads share a name; then routed paths per layer and width w, separated by ;. In a path a pad name is that pad's centre, name@x,y a point inside that pad or via, vN(x,y) a via of type N, cw(c..) or ccw(c..) an arc to the next point about the centre after c; other vN are vias at no path point)
5V_OUT: C14.1 C15.1 DD2.12 L1.2 R9.2 R13.1 X2.1 | length 28.1
  Top Layer w0.3: v1(31.7,18) R9.2 ; v1(42.2,10.8) 42.257,10.857 42.607,10.857 42.915,11.165 44.16,11.165 DD2.12@44.22,11.225 ; R13.1 46.75,4.525 46.75,5.324 46.926,5.5 C14.1
  Top Layer w0.4: DD2.12@44.22,11.225 44.26,11.265 45.765,11.265
  Top Layer w0.5: 45.765,11.265 46,11.5
  Bottom Layer w0.3: v1(31.7,18) 38.9,10.8 v1(42.2,10.8)
12V_IN: C5.1 C7.1 C12.1 DD1.15 DD1.16 DD2.3 DD2.4 R6.2 R12.2 VD3.1 | length 16.8
  Top Layer w0.3: R12.2 v1(42.25,4.25)
  Bottom Layer w0.3: 33.95,14.55 36.25,12.25 36.25,6.75 38.75,4.25 v1(42.25,4.25)
  other v1: 19.085,10.2 20.485,10.3 25.785,10.3 27.185,10.4 19.085,11.2 20.5,11.2 25.785,11.3 27.2,11.3 19.085,12.1 20.485,12.2 25.785,12.2 27.185,12.3 25.785,13.6 27.185,13.7 19.385,14.2 20.785,14.3 15.885,14.4 17.285,14.5 25.785,14.6 27.2,14.6 19.385,15.2 20.8,15.2 15.885,15.4 17.3,15.4 25.785,15.5 27.185,15.6 36.7,15.9 19.385,16.1 20.785,16.2 15.885,16.3 17.285,16.4 36.1,16.7 36.8,17.3 36,17.7 36.8,18.3 35.985,18.8
GND: C1.2 C2.2 C3.2 C5.2 C7.2 C8.2 C9.2 C10.2 C12.2 C14.2 C15.2 DD1.9 DD2.0 DD2.10 DD2.13 DD2.14 HL1.1 HL2.1 pad.2 R4.1 R7.1 R10.1 R11.1 S1.2 VD1.1 VD3.2 X1.2 X2.2 | length 3.6
  Top Layer w0.3: DD2.0@41.25,13.225 DD2.0 ; 42.6,11.875 44.22,11.875 DD2.14@44.22,12.525 ; R11.1 50.8,19.175 50.8,18.2
  other v1: 43.385,1.2 49.885,1.2 44.785,1.3 51.285,1.3 10.5,1.5 11.9,1.6 43.385,2.2 44.8,2.2 49.885,2.2 51.3,2.2 10.5,2.5 11.915,2.5 43.385,3.1 49.885,3.1 32.885,3.2 44.785,3.2 51.285,3.2 34.285,3.3 10.5,3.4 11.9,3.5 17.5,3.5 18.9,3.6 26.5,4 27.9,4.1 32.885,4.2 34.3,4.2 17.5,4.5 18.915,4.5 26.5,5 27.915,5 32.885,5.1 34.285,5.2 17.5,5.4 18.9,5.5 26.5,5.9 27.9,6 32.285,6.3 33.5,6.5 34.9,6.6 32.3,7.2 33.5,7.5 34.915,7.5 59.885,7.7 61.285,7.8 32.285,8.2 33.5,8.4 34.9,8.5 59.885,8.7 61.3,8.7 59.885,9.6 61.285,9.7 40.5,12 42,12 40.5,13 42,13 40.5,14 42,14 40.5,15 42,15 11.7,15.9 12,17.2 50.6,17.9 15.885,20.7 17.285,20.8 34.5,21 35.4,21.1 7.4,21.385 8.3,21.385 9.3,21.385 11.4,21.385 12.3,21.385 13.3,21.385 39.9,21.385 40.8,21.385 41.8,21.385 15.885,21.7 17.3,21.7 15.885,22.6 17.285,22.7 7.3,22.785 9.2,22.785 11.3,22.785 13.2,22.785 39.8,22.785 41.7,22.785 8.3,22.8 12.3,22.8 40.8,22.8
NetC1_1: C1.1 DD2.2 R4.2 R6.1 | length 16.9
  Top Layer w0.3: R6.1 33.55,21.25 34.275,21.975 R4.2 C1.1 36.2,21.95 36.2,21.1 36.575,20.725 38.375,20.725 38.9,20.2 38.9,17.5 39.476,16.924 39.476,16.132 39.179,15.835 38.34,15.835 DD2.2@38.28,15.775
NetC3_1: C3.1 DD2.11 | length 1.8
  Top Layer w0.3: DD2.11@44.22,10.575 44.44,10.575 44.5,10.515 C3.1
NetC4_1: C4.1 DD1.12 | length 6.7
  Top Layer w0.3: C4.1 12.75,11.949 14.605,10.094 14.605,9.238 15.389,8.454 15.921,8.454 DD1.12
NetC4_2: C4.2 DD1.0 DD1.6 DD1.8 R3.1 R8.1 | length 20.7
  Top Layer w0.15: DD1.8 9.537,6.475 8.887,7.125 v1(8.85,7.125) 9.5,7.775 DD1.6
  Top Layer w0.3: DD1.8@10.021,6.504 DD1.8 ; DD1.6 DD1.6@10.079,7.804 ; C4.2 12.75,15.75 v1(13,16) 13,20.025
  Top Layer w0.5: R3.1 13,20.025 R8.1
  Bottom Layer w0.3: v1(8.85,7.125) 8.85,11.85 v1(13,16)
  other v1: 12.25,8 13.75,8 12.25,9.5 13.75,9.5
NetC6_1: C6.1 DD2.7 R9.1 R10.2 | length 13
  Top Layer w0.3: C6.1 33.55,17.25 R9.1@34.275,17.975 ; R9.1 R9.1@34.275,17.975 ; DD2.7@38.28,12.525 38.22,12.585 37.381,12.585 34.55,15.416 34.55,15.725 R10.2 R9.1@34.275,17.975
NetC6_2: C6.2 R5.2 | length 4
  Top Layer w0.3: C6.2 29.3,18.75 30.55,20 R5.2
NetC8_1: C8.1 DD2.9 | length 5.5
  Top Layer w0.3: C8.1 38.15,7.7 39.75,9.3 39.75,10.594 39.179,11.165 38.34,11.165 DD2.9@38.28,11.225
NetC10_1: C10.1 DD2.1 | length 4.1
  Top Layer w0.3: C10.1 37.75,16.485 37.81,16.425 DD2.1@38.28,16.425
NetC11_1: C11.1 DD2.20 | length 5.1
  Top Layer w0.3: C11.1 41.25,16.676 41.501,16.425 DD2.20@44.22,16.425
NetC11_2: C11.2 C13.1 DD2.17 DD2.18 DD2.19 L1.1 VD2.1 | length 8.3
  Top Layer w0.5: DD2.17@44.22,14.475 45.285,14.475 46.975,14.475 L1.1 L1.1@46.375,15.125 ; DD2.18@44.22,15.125 v1(45.282,15.125) L1.1@46.375,15.125 ; DD2.19@44.22,15.775 45.285,15.775 45.725,15.775 L1.1@46.375,15.125
  other v1: 45.75,6.95 47.1,6.95 48.375,6.95 45.825,10 48.375,10.025 47.1,10.05 45.285,14.5 45.285,15.8 45.7,17.5 46.8,17.8 43.6,20.9 44.6,21.3
NetC13_2: C13.2 R11.2 | length 2.6
  Top Layer w0.5: C13.2 48.95,20.462 49.2,20.713 50.688,20.713 R11.2
NetDD1_3: DD1.3 R1.1 R2.2 | length 17.9
  Top Layer w0.3: v1(7,8.5) 8.2,8.5 9.275,9.575 9.384,9.575 9.534,9.725 DD1.3
  Top Layer w0.5: R1.1 v1(9,20.025) R2.2
  Bottom Layer w0.3: v1(7,8.5) 7,18.025 v1(9,20.025)
NetDD1_5: DD1.5 R2.1 R3.2 | length 16.8
  Top Layer w0.3: v1(7.8,7.6) 8.1,7.6 8.9,8.4 10.025,8.4 DD1.5
  Top Layer w0.5: R2.1 v1(11,18.475) R3.2
  Bottom Layer w0.3: v1(7.8,7.6) 7.8,15.275 v1(11,18.475)
NetDD1_11: DD1.11 R8.2 | length 14.7
  Top Layer w0.3: v1(14,17.5) R8.2 ; DD1.11 15.962,7.762 17.238,7.762 v1(17.25,7.75)
  Bottom Layer w0.3: v1(14,17.5) 14,12.959 14.75,12.209 14.75,7.926 14.926,7.75 v1(17.25,7.75)
NetDD2_6: DD2.6 R5.1 | length 9
  Top Layer w0.3: R5.1 34.439,19.836 34.439,19.1 35.2,18.339 35.2,15.416 37.381,13.235 38.22,13.235 DD2.6@38.28,13.175
NetDD2_8: DD2.8 R7.2 | length 4.9
  Top Layer w0.3: R7.2 34.275,13.975 34.55,13.7 35.274,13.7 37.039,11.935 38.22,11.935 DD2.8@38.28,11.875
NetDD2_15: DD2.15 DD2.16 VD2.2 | length 22
  Top Layer w0.3: DD2.15@44.22,13.175 43.54,13.175 43.215,13.5 43.54,13.825 DD2.16@44.22,13.825
  Bottom Layer w0.3: v1(43.215,13.525) 43.215,7.785 45.25,5.75 49.574,5.75 49.75,5.926 49.75,8.25 ; v1(49.575,10.025) 49.75,9.85 49.75,8.25 ; v1(51.25,10.025) 51.193,9.968 51.193,9.693 49.75,8.25
NetHL1_2: HL1.2 R12.1 | length 2.4
  Top Layer w0.3: R12.1 39.7,4.225 41.075,2.85 41.075,2.75 HL1.2
NetHL2_2: HL2.2 R13.2 | length 1.8
  Top Layer w0.3: R13.2 48.05,4.225 48.05,2.525 HL2.2
nSHDN: C9.1 DD1.7 S1.1 | length 33.3
  Top Layer w0.3: DD1.7 10.566,7.125 10.716,6.975 10.732,6.975 11.25,6.457 C9.1 v1(12.5,5) ; v1(30,2.25) 31.21,2.25 31.46,2.5 31.46,11.1 S1.1@31.26,11.3
  Bottom Layer w0.3: v1(12.5,5) 15.25,2.25 v1(30,2.25)
RAW_IN: C2.1 DD1.1 DD1.2 R1.2 VD1.2 X1.1
pads on no net: DD1.4 DD1.10 DD1.13 DD1.14 DD2.5

## Polygon pours and split planes (outlines as drawn)
GND on Top Layer "GND_L01_P042" (solid, remove dead copper, pour order 42): 0,0 0,24 65,24 65,0
12V_IN on Top Layer "12V_IN_L01_P038" (solid, remove dead copper, pour order 38): 39.5,15.5 37.3,15.5 37.3,19.2 37.2,19.3 35.5,19.3 35.5,15.7 37.1,14.1 39.5,14.1
12V_IN on Top Layer "12V_IN_L01_P034" (solid, remove dead copper, pour order 34): 14.8,10 16.9,10 16.9,8.9 18.2,7.6 28.5,7.6 28.5,22.6 26.9,22.6 26.9,17.1 26.2,16.4 24.1,16.4 24.1,22.6 18.8,22.6 18.8,17.6 15.1,17.6 14.9,17.4
5V_OUT on Top Layer "5V_OUT_L01_P028" (solid, remove dead copper, pour order 28): 51.6,22 51.6,17.1 48.9,17.1 48.9,12.7 45.4,12.7 45.4,10.9 51.6,10.9 52.2,10.3 52.2,3.6 57.7,3.6 57.7,11.3 62.4,11.3 62.4,15.5 56.9,15.5 53.6,18.8 53.6,22
RAW_IN on Top Layer "RAW_IN_L01_P018" (solid, remove dead copper, pour order 18): 0,9 0,17.5 6.5,17.5 6.5,19.375 9,19.375 9,17.5 8.25,17.5 8.25,14.75 11.35,14.75 11.35,10.175 11.044,10.175 8.848,10.175 7.988,9
NetC11_2 on Top Layer "NETC11_2_L01_P026" (solid, remove dead copper, pour order 26): 43.1,21.8 47.3,21.8 47.4,21.7 47.4,16.9 43.1,16.9
NetC11_2 on Top Layer "NETC11_2_L01_P024" (solid, remove dead copper, pour order 24): 45.3,10.5 45.3,6.5 48.8,6.5 48.8,10.5
no net on Top Layer "NONET_L01_P036" (solid, remove dead copper, pour order 36): 39.5,15.5
NetDD2_15 on Top Layer "NETDD2_15_L01_P002" (solid, remove dead copper, pour order 2): 51.7,10.3 51.7,6.9 49.1,6.9 49.1,10.3
GND on Top Layer "GND_L01_P020" (solid, remove dead copper, pour order 20): 12.25,17.75 12.25,16 11.25,15 8.5,15 8.5,17.25 9.25,17.25 9.25,17.75
no net on Top Layer "NONET_L01_P016" (solid, remove dead copper, pour order 16): 0,22
GND on Bottom Layer "GND_L02_P050" (solid, remove dead copper, pour order 50): 0,0 0,24 65,24 65,0
12V_IN on Bottom Layer "12V_IN_L02_P040" (solid, remove dead copper, pour order 40): 37.5,20 37.5,14.5 37.3,14.3 28,14.3 28,9.5 18.25,9.5 18.25,13.5 18,13.75 15,13.75 15,17.25 17.25,17.25 20,20
NetC11_2 on Bottom Layer "NETC11_2_L02_P006" (solid, remove dead copper, pour order 6): 49.5,10.5 49,10.5 48.8,10.3 48.8,6.9 45.7,6.9 45.2,7.4 45.2,14.3 45.2,16 45.3,16.1 45.3,16.8 43.1,16.8 43.1,21.8 47.3,21.8 47.3,18.1 49.5,18.1

## Silkscreen, mask and mechanical layers (free items; w line width, h text height)
Top Overlay:
  text "GND" at 59.25,19.75 h2
  text "12V IN" at 2.75,13.25 h2
  text "5V OUT" at 58.25,9.5 h2
  text "GND" at 4,3 h2
  text ".designation" at 3,1 h2
  text "12V IN" at 39.25,0.75 h1.2
  text "5V OUT" at 45.75,0.75 h1.2
Bottom Overlay:
  text ".pcb_dec_number" at 19,1 h2
Board:
  the board outline again, w0.1
Assembly Notes (Mech5):
  text "'.title'" at 0,-2 h2
  text "'.project'_'.pcb_dec_number'['.Pcb_File_Name_No_Path']" at 0,-4 h2